# Altium PCB rookieboard_macrofab.PcbDoc (part 2 of 3)
Units mm, origin at the board's own origin, x right, y up, seen from the top; angles counter-clockwise.
Board outline 100 x 50 mm, 4 copper layers (Top Layer, Ground, Power, Bottom Layer), stack 0.971 mm thick; 136 components, 90 nets, 459 pads, 215 vias.
Unrouted connection lines stored in the file: 2.
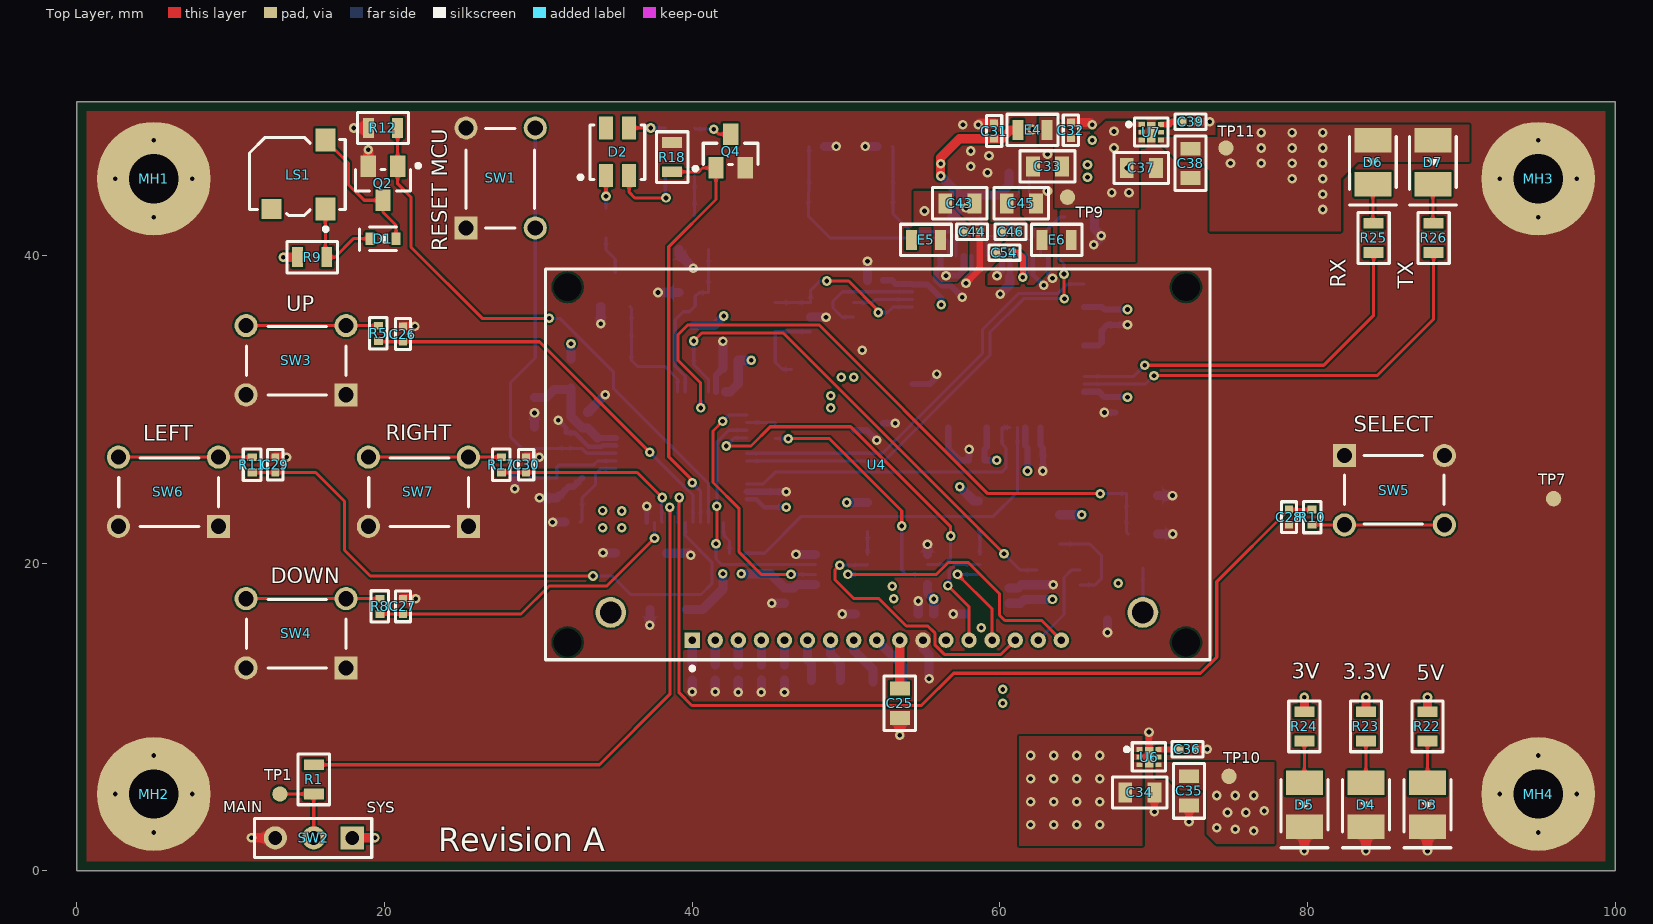
[diagram p0: Top Layer view]

## Part data (continued)
Y2: library part ABLS7M2-12.000MHZ-D-2Y-T, "Crystals 12.0MHz 18pF 30ppm -40C +85C", ESR (Equivalent Series Resistance)="60 Ohm", Frequency Stability=±30ppm, Frequency Tolerance=±20ppm, Load Capacitance=18pF, Manufacturer=Abracon, Operating Mode=Fundamental, Operating Temperature="-40°C ~ 85°C", Package / Case="2-SMD, Flat Lead", Ratings=-, Supplier Part Number 1=535-12824-1-ND, Category="Crystals and Oscillators", Family=Crystals, Frequency=12MHz, Height="0.079\" (2.00mm)", Manufacturer Part Number=ABLS7M2-12.000MHZ-D-2Y-T, Mounting Type="Surface Mount", Packaging="Tape & Reel (TR)", Pricing 1="1=0.4, 10=0.33, 50=0.297, 100=0.264, 500=0.2508, 1000=0.2112 (USD)", Series=ABLS7M2, Size / Dimension="0.276\" L x 0.161\" W (7.00mm x 4.10mm)", Stock 1=6192, Supplier 1=Digi-Key, Type="MHz Crystal"

## Via types
v1: diameter 0.625, hole 0.305, Top Layer to Bottom Layer, tented both sides, 185 vias
v2: diameter 0.625, hole 0.305, Top Layer to Bottom Layer, 16 vias
v3: diameter 0.625, hole 0.305, Top Layer to Bottom Layer, tented top, 11 vias
v4: diameter 0.625, hole 0.305, Top Layer to Bottom Layer, tented bottom, 3 vias

## Nets (pads, with @x,y where several pads share a name; then routed paths per layer and width w, separated by ;. In a path a pad name is that pad's centre, name@x,y a point inside that pad or via, vN(x,y) a via of type N, cw(c..) or ccw(c..) an arc to the next point about the centre after c; other vN are vias at no path point)
+1V8_FT: C40.2 C41.2 C52.2 C53.2 C54.2 U8.12 U8.37 U8.49 U8.64 | length 11.2
  Top Layer w0.4: C54.2@60.8,40.2 61.2,40.2 61.5,39.9 v1(61.5,38.6)
  Bottom Layer w0.4: C52.2@52.4,38.4 53,38.4 53.25,38.15 U8.64@54.325,38.15 54.343,38.132 55.285,38.132 56.2,37.217 v1(56.2,36.8) ; v1(61.5,38.6) 61.65,38.75 U8.12@61.65,39.975 ; U8.37@61.65,28.825 61.65,27.65 61.8,27.5 C53.2@61.8,26.7 v1(61.8,26)
  other v1: 49,30.1 49,30.9
+3V0: C12.1 C15.2 C23.2 C35.2 E3.1 R24.2 TP10.1 U2.6 U3.8 U4.18 U5.8 U6.4 | length 0.9
  Top Layer w0.6: R24.2@79.8,10.35 v1(79.8,11.3)
  other v1: 76.5,2.6 75.3,2.7 74.1,2.8 74.8,3.8 76,3.8 77.2,3.9 74.1,4.9 75.3,4.9 76.5,4.9 60.2,10.9 60.2,11.8 58.8,15.8 53.1,17.7 53,18.5 67.7,18.7
+3V0_LCD: C13.2 E3.2 U4.12
+3V3: C10.2 C11.2 C14.2 C22.2 C34.2 C38.2 C42.2 C47.2 C48.2 C49.2 C50.2 C51.2 D2.4 D6.2 D7.2 E1.1 E2.1 E5.1 E6.1 R2.2 R3.1 R4.1 R6.1 R9.2 R23.2 R27.1 R29.1 SW2.1 TP11.1 U1.36 U2.1 U3.1 U5.1 U6.1 U6.3 U7.4 U8.20 U8.31 U8.42 U8.50 U8.56 U9.6 | length 39
  Top Layer w0.6: v1(13.425,39.9) R9.2@14.35,39.9 ; SW2.1@17.9,2.15 v1(19.375,2.15) ; R23.2@83.8,10.35 v1(83.8,11.3)
  Bottom Layer w0.3: U1.36@43.55,24.15 44.175,24.15 44.675,23.65 C10.2@45.35,23.65 v1(46.125,23.65)
  Bottom Layer w0.4: U8.42@59.15,28.825 59.15,27.55 59,27.4 C48.2@59,26.7 v1(59.8,26.7) ; U8.31@65.475,31.15 66.45,31.15 66.8,30.8 C49.2@67.525,30.8 v1(68.3,30.8) ; U8.20@65.475,36.65 66.65,36.65 66.8,36.5 C50.2@67.525,36.5 v1(68.3,36.5)
  Bottom Layer w0.6: E2.1@32.125,33.275 v1(32.125,34.275) ; E1.1@39.625,17 40.675,17 42,18.325 v1(42,19.325) ; R2.2@40.1,35.45 41.425,35.45 v1(42.05,36.075) ; v1(43.2,19.325) 45.075,19.325 C22.2@46,18.4 46.625,18.4 46.85,18.625 U5.1@48,18.625 ; v1(50.05,23.95) R6.1@51.4,23.95 ; U3.1@55.3,18.625 55.3,18.075 v1(55.7,17.675) C14.2@55.7,16.7 ; v1(57.4,24.975) 58.325,24.05 R4.1@58.6,24.05 ; C11.2@60.6,17.4 61.35,17.4 61.6,17.65 U2.1@62.4,17.65 v1(63.425,17.65) ; R3.1@63.9,23.15 v1(65.325,23.15) ; v1(66.1,40.7) 66.6,41.2 v1(66.6,41.3) 66.15,41.75 R27.1@66.15,42.5
  other v1: 62,3 63.5,3 65,3 66.5,3 62,4.5 63.5,4.5 65,4.5 66.5,4.5 62,6 63.5,6 65,6 66.5,6 62,7.5 63.5,7.5 65,7.5 66.5,7.5 49.7,32.1 50.5,32.1 81,43 81,44 79,45 81,45 75,46 77,46 79,46 81,46 77,47 79,47 81,47 77,48 79,48 81,48
+3V3_MCU_AVDD: C8.2 C9.2 E2.2 U1.9 | length 8
  Bottom Layer w0.4: 33.85,28.15 U1.9@35.05,28.15
  Bottom Layer w0.6: C9.2@29.75,30.775 30.5,30.775 31.025,31.3 32.05,31.3 E2.2@32.125,31.375 32.125,29.525 32.85,28.8 C8.2@33.2,28.8 33.85,28.15